# Altium PCB Mechatronic.PcbDoc
Units mil, origin at the board's own origin, x right, y up, seen from the top; angles counter-clockwise.
Board outline 1770 x 4130 mil, 2 copper layers (Top Layer, Bottom Layer), stack 61.756 mil thick; 42 components, 23 nets, 157 pads, 37 vias.
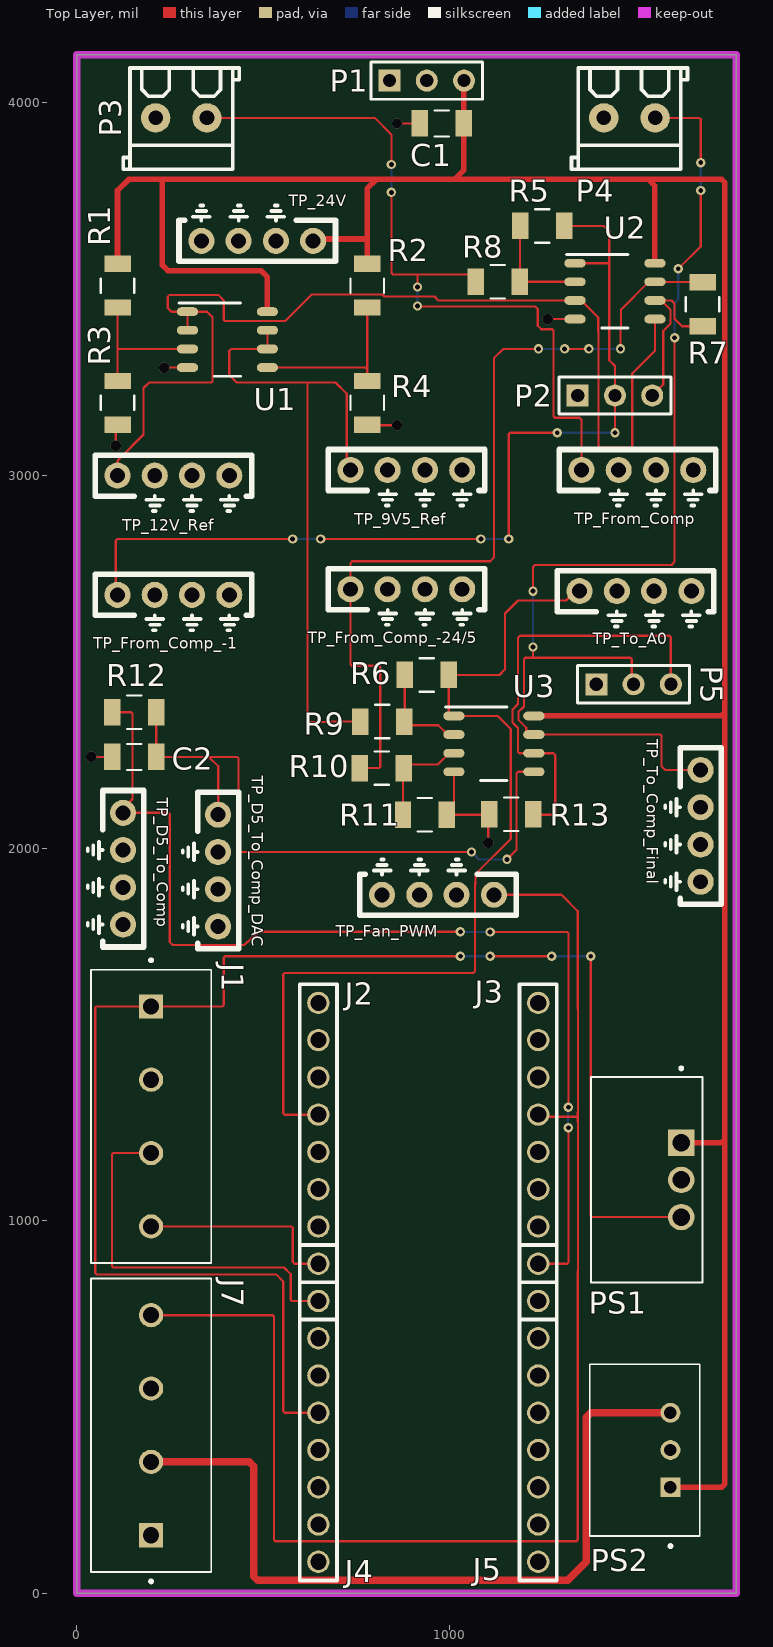
[diagram p0: Top Layer view]
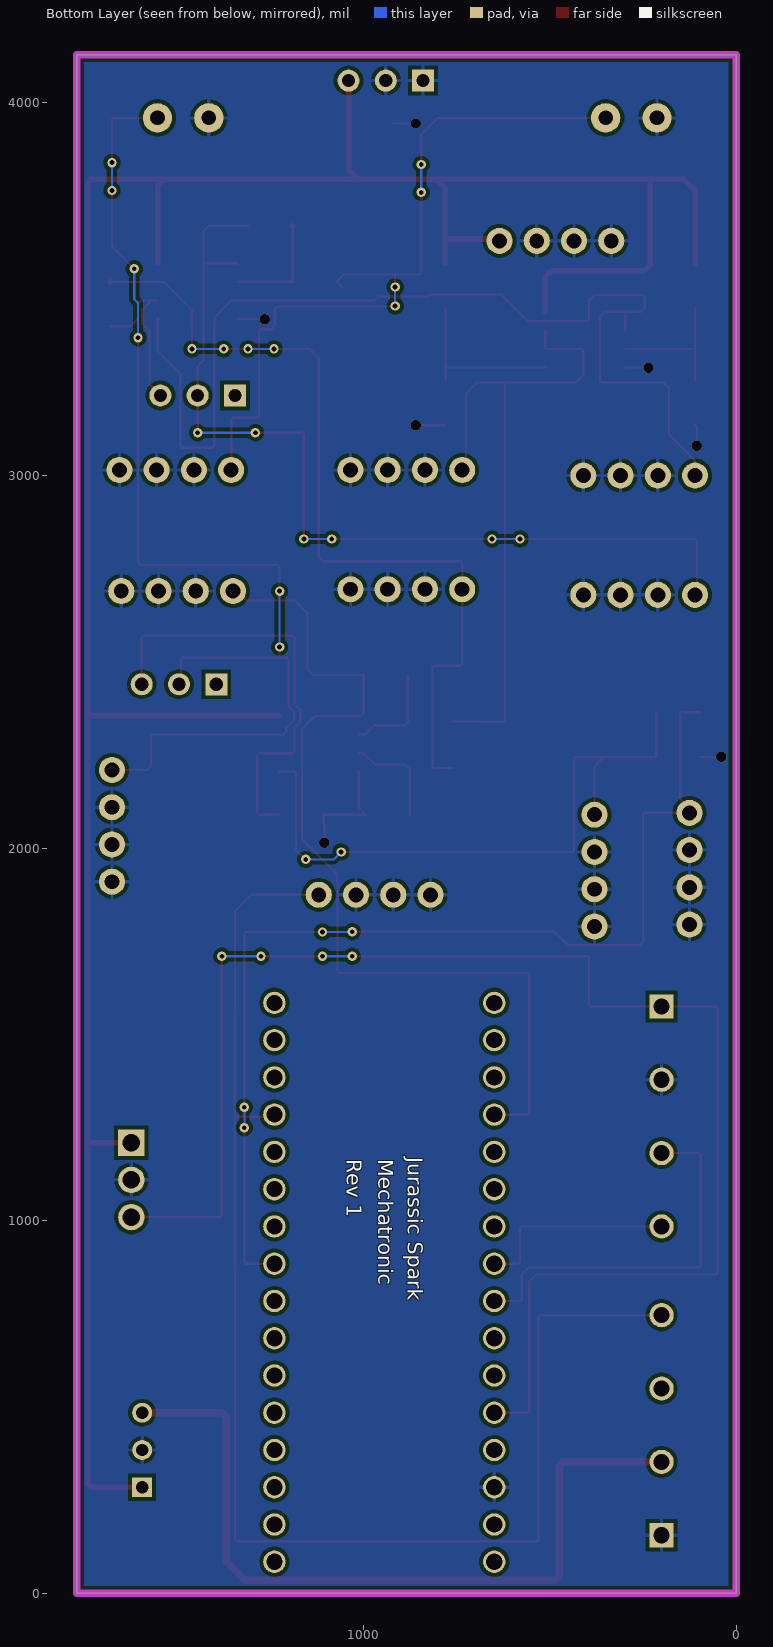
[diagram p1: Bottom Layer view, seen from below]
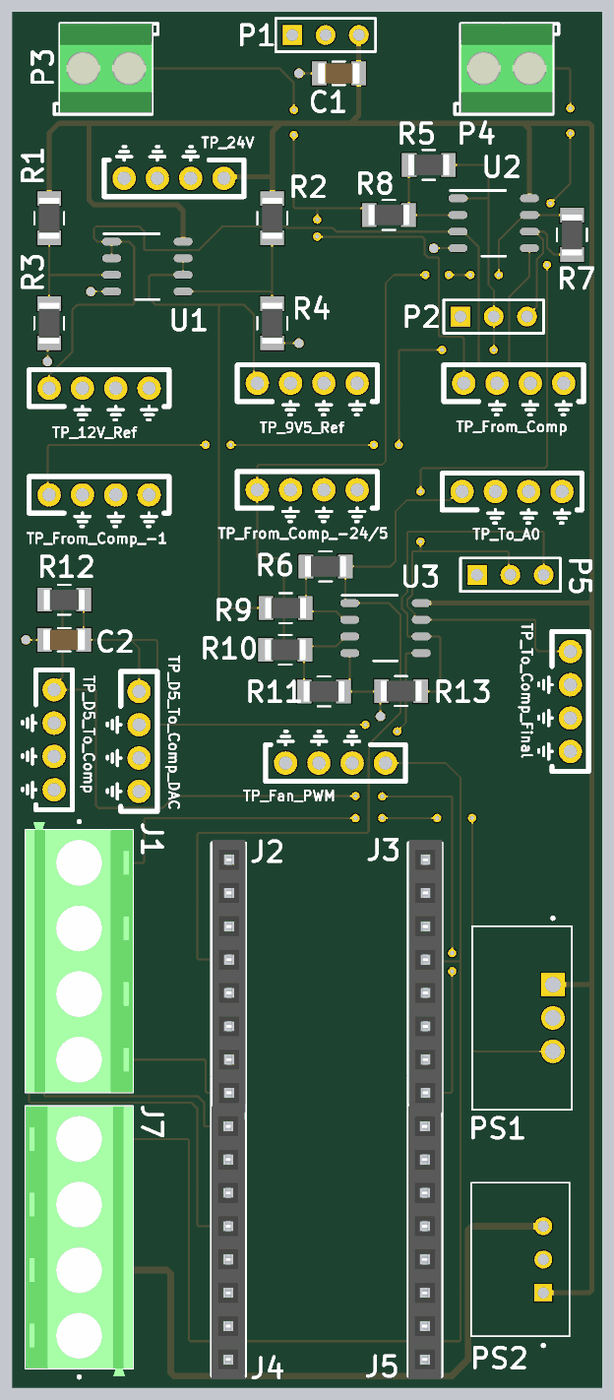
[diagram p2: 3D render of the assembled board from above, using the file's embedded part models]

## Layer stack, top to bottom
Top Solder: solder mask 1, SM-001, Dk 4
Top Layer: signal copper 1.378
Dielectric 1: core 59, Core-043, Dk 4.3
Bottom Layer: signal copper 1.378
Bottom Solder: solder mask 1, SM-001, Dk 4

## Board outline
0,0 1770,0 1770,4130 0,4130

## Design rules (kind name [scope] priority, off if disabled: settings)
BoardOutlineClearance [All] p1: gap=10 ignorepadtopadclearanceinfootprint=FALSE except(0: Arc-SplitContinuation Track-SplitContinuation SMDPad-SplitContinuation THPad-SplitContinuation Via-SplitContinuation Fill-SplitContinuation Poly-SplitContinuation Region-SplitContinuation Text-SplitContinuation)
Clearance [All] p1: gap=10 ignorepadtopadclearanceinfootprint=FALSE
PlaneClearance [All] p1: clearance=10
PlaneConnect [All] p1: planeconnectstyle=Direct reliefexpansion=20 reliefentries=4 reliefconductorwidth=10 reliefairgap=10
PolygonConnect [All] p1: thpad.connectstyle=Relief thpad.reliefconductorwidth=10 thpad.reliefentries=4 thpad.polygonreliefangle="90 Angle" thpad.airgapwidth=10 smdpad.connectstyle=Direct smdpad.reliefconductorwidth=10 smdpad.reliefentries=4 smdpad.polygonreliefangle="90 Angle" smdpad.airgapwidth=10 via.connectstyle=Direct via.reliefconductorwidth=10 via.reliefentries=4 via.polygonreliefangle="90 Angle" via.airgapwidth=10
RoutingVias [All] p1: holewidth=13 width=25 viastyle="Through Hole" minholewidth=13 minwidth=25 maxholewidth=60 maxwidth=80
SolderMaskExpansion [All] p1: expansion=4 istentingtop=FALSE
SupplyNets "Schematic Supply Nets_1" [InNet('GND')] p1: voltage=0.000
SupplyNets "Schematic Supply Nets" [InNet('+24')] p2: voltage=0.000
UnRoutedNet [All] p1: checkbadconnections=TRUE
Width [All] p1: maxlimit=100 minlimit=6 preferedwidth=6 minimp=50.000000 maximp=50.000000 favimp=50.000000
27 further rules are at their usual default settings.

## Components (designator, comment, footprint, x,y, rotation, side; value= is the part's Value field where it differs from the comment)
C1 "22uF" 1206_Passive_Capacitor 980,3945 r0 top
C2 "10uF" 1206_Passive_Capacitor 155,2245 r0 top
J1 "282836-4" TE_282836-4 200,1280.28 r270 top
J2 "PPTC081LFBN-RC" "8_PIN_100MIL - Female" 648.93,885 r90 top value=Female
J3 "PPTC081LFBN-RC" "8_PIN_100MIL - Female" 1238.93,885 r90 top value=Female
J4 "PPTC081LFBN-RC" "8_PIN_100MIL - Female" 648.93,785 r270 top value=Female
J5 "PPTC081LFBN-RC" "8_PIN_100MIL - Female" 1238.93,785 r270 top value=Female
J7 "282836-4" TE_282836-4 200,451.57 r90 top
P1 "Header 3" HDR1X3 840,4060 r0 top
P2 "48k_Pot" HDR1X3 1345,3215 r0 top
P3 "From_Comp_Input" "P_Terminal block 3.5mm-pitch" 281.1,3960 r180 top
P4 "To_Comp" "P_Terminal block 3.5mm-pitch" 1483.9,3960 r180 top
P5 "38k_Pot" HDR1X3 1395,2440 r0 top
PS1 "TSR_3-2450N" CONV_TSR_3-2450N 1530,1110 r270 top
PS2 "TSR_1-2412" CONV_TSR_1-2412 1525,385 r90 top
R1 "10k" 1206_Passive_Resitor 110,3510 r90 top value=10KOhm
R2 "0 Ohm" 1206_Passive_Resitor 780,3510 r90 top value=6kOhm
R3 "10k" 1206_Passive_Resitor 110,3195 r90 top value=10KOhm
R4 "0 Ohm" 1206_Passive_Resitor 780,3195 r90 top value=4kOhm
R5 "10k" 1206_Passive_Resitor 1250,3670 r0 top value=10KOhm
R6 "10k" 1206_Passive_Resitor 940,2465 r0 top value=10KOhm
R7 "10k" 1206_Passive_Resitor 1680,3460 r90 top value=10KOhm
R8 "10k" 1206_Passive_Resitor 1130,3520 r0 top value=10KOhm
R9 "10k" 1206_Passive_Resitor 820,2340 r0 top value=10KOhm
R10 "10k" 1206_Passive_Resitor 819,2215 r0 top value=10KOhm
R11 "10k" 1206_Passive_Resitor 935,2090 r180 top value=10KOhm
R12 "10k" 1206_Passive_Resitor 155,2365 r0 top value=10KOhm
R13 "10k" 1206_Passive_Resitor 1167,2091 r180 top value=10KOhm
TP_9V5_Ref "TP_9V5_Ref" TP10x_Probe 885,3015 r0 top (schematic designator TP3)
TP_12V_Ref "TP_12V_Ref" TP10x_Probe 260,3000 r0 top (schematic designator TP2)
TP_24V "TP_24V" TP10x_Probe 485,3630 r180 top (schematic designator TP1)
TP_D5_To_Comp "TP_D5_To_Comp" TP10x_Probe 125,1945 r270 top (schematic designator TP10)
TP_D5_To_Comp_DAC "TP_D5_To_Comp_DAC" TP10x_Probe 380,1940 r270 top (schematic designator TP8)
TP_Fan_PWM "TP_Fan_PWM" TP10x_Probe 970,1875 r180 top (schematic designator TP11)
TP_From_Comp "TP_From_Comp" TP10x_Probe 1505,3015 r0 top (schematic designator TP4)
TP_From_Comp_-1 "TP_Comp_After_-1" TP10x_Probe 260,2680 r0 top (schematic designator TP5)
TP_From_Comp_-24/5 "TP_Comp_After_-24/5" TP10x_Probe 885,2695 r0 top (schematic designator TP6)
TP_To_A0 "TP_To_A0" TP10x_Probe 1500,2690 r0 top (schematic designator TP7)
TP_To_Comp_Final "TP_To_Comp" TP10x_Probe 1675,2060 r270 top (schematic designator TP9)
U1 "OPA2196IDR" D0008A_N 405,3365 r0 top
U2 "OPA2196IDR" D0008A_N 1445,3495 r0 top
U3 "OPA2196IDR" D0008A_N 1120,2280 r0 top

## Footprints (in the part's own frame and the unit in brackets; to place one, negate y for a bottom-side part, rotate by r counter-clockwise, add the part's x,y. Pads: shape width x height; smd on the part's side, far side on the other; paste and mask are expansions set on the pad)
"8_PIN_100MIL - Female" [mil]
  round 60 hole 43.31: 1(0,0) 2(100,0) 3(200,0) 4(300,0) 5(400,0) 6(500,0) 7(600,0) 8(700,0)
  silkscreen extent -50,-50 750,50, body extent -60,-51 760,49, height 335
1206_Passive_Capacitor [mil]
  rect 44x71 smd: 1(-59,0) 2(59,0)
  silkscreen extent -19,-35 19,35, body extent -63,-31 63,32, height 50
1206_Passive_Resitor [mil]
  rect 44x71 smd: 1(-59,0) 2(59,0)
  silkscreen extent -19,-45 19,45, body extent -61,-31 61,31, height 26
CONV_TSR_1-2412 [mm]
  rect 1.358x1.358 hole 0.85: 1(-2.54,-1.75)
  round 1.358 hole 0.85: 2(0,-1.75) 3(2.54,-1.75)
  silkscreen extent -6.65,-3.75 5.85,3.75
CONV_TSR_3-2450N [mm]
  rect 1.8x1.8 / inner round 1.8 / far side rect 1.8x1.8 hole 1.2: 1(-2.54,2.36)
  round 1.8 hole 1.2: 2(0,2.36) 3(2.54,2.36)
  silkscreen extent -7.7,-3.8 7,3.8
D0008A_N [mm]
  oval 1.45x0.6 smd paste+0 mask+0.051: 1(-2.725,1.905) 2(-2.725,0.635) 3(-2.725,-0.635) 4(-2.725,-1.905) 5(2.725,-1.905) 6(2.725,-0.635) 7(2.725,0.635) 8(2.725,1.905)
  silkscreen extent -3.3,-2.5 0.9,2.5
HDR1X3 [mm] "Connector; Header; 3 Position"
  rect 1.5x1.5 hole 0.9: 1(0,0)
  round 1.5 hole 0.9: 2(2.54,0) 3(5.08,0)
  silkscreen extent -1.27,-1.27 6.35,1.27
"P_Terminal block 3.5mm-pitch" [mm]
  round 2 hole 1: 1(-1.75,0) 2(1.75,0)
  silkscreen extent -3.95,-3.4 3.95,3.5, body extent -3.5,-3.4 3.5,3.4, height 8.4
TE_282836-4 [mm]
  rect 1.65x1.65 / inner round 1.65 / far side rect 1.65x1.65 hole 1.1: 1(-7.5,0)
  round 1.65 hole 1.1: 2(-2.5,0) 3(2.5,0) 4(7.5,0)
  silkscreen extent -10.74,-4.1 10,4.1, body extent -10.6,-4.1 10,4.1, height 10
TP10x_Probe [mil] "Small Probs footprint"
  round 70 hole 40: 1(-150,0) 2(-50,0) 2(50,0) 2(150,0)
  silkscreen extent -210,-95 210,55

## Part data
C1: library part C_22uF_1206, "22uF ±10% 25V X5R 1206 Multilayer Ceramic Capacitors MLCC - SMD/SMT RoHS", LCSC Part#=C12891, MFR Part #=CL31A226KAHNNNE, Datasheet=https://datasheet.lcsc.com/lcsc/1811031514_Samsung-Electro-Mechanics-CL31A226KAHNNNE_C12891.pdf, Type=basic
C2: library part C_10uF_1206, "10uF ±10% 50V X5R 1206 Multilayer Ceramic Capacitors MLCC - SMD/SMT RoHS", LCSC Part#=C13585, MFR Part #=CL31A106KBHNNNE, Datasheet=https://datasheet.lcsc.com/lcsc/1810221112_Samsung-Electro-Mechanics-CL31A106KBHNNNE_C13585.pdf, Type=Basic
J1 J7: "4 Position Wire to Board Terminal Block Horizontal with Board 0.197 (5.00mm) Through Hole", Package=None, Availability="In Stock", Check_prices=https://www.snapeda.com/parts/282836-4/TE+Connectivity+AMP+Connectors/view-part/?ref=eda, MF="TE Connectivity", MP=282836-4, Price=None, Purchase-URL=https://pricing.snapeda.com/search/part/282836-4/?ref=eda, SnapEDA_Link=https://www.snapeda.com/parts/282836-4/TE+Connectivity+AMP+Connectors/view-part/?ref=snap
J2 J3 J4 J5: library part JF_8_PIN_FEMALE, "8 Position Header Connector 0.100\" (2.54mm) Through Hole Tin", LCSC Part#=C27438, Digikey Link=https://www.digikey.com/product-detail/en/PPTC081LFBN-RC/S7006-ND/810147/?itemSeq=304982354, MFR Part #=PPTC081LFBN-RC, Type=Extended
P1: "Header, 3-Pin", LatestRevisionDate=17-Jul-2002, LatestRevisionNote="Re-released for DXP Platform.", Publisher="Altium Limited"
P2 P5: library part "Header 3", "Header, 3-Pin", LatestRevisionDate=17-Jul-2002, LatestRevisionNote="Re-released for DXP Platform.", Publisher="Altium Limited"
P3 P4: library part "P_Terminal block", "Green Straight pin 3.5mm  pitch; P=3.5mm  Screw terminal ROHS", LCSC Part#=C474892, Manufacturer="Cixi Kefa Elec", MFR Part #=KF350-3.5-2P, Datasheet=https://datasheet.lcsc.com/lcsc/2001160007_Cixi-Kefa-Elec-KF350-3-5-2P_C474892.pdf
PS1 PS2: Package=None, Availability=Unavailable, Price=None
  PS1: MF="{'manufacturer': u'Traco Power'}", MP=TSR_3-2450N
  PS2: MP=TSR_1-2412
R1 R3 R5 R6 R7 R8 R9 R10 R11 R12 R13: library part R_10KOhm_1206, "10 kOhms ±5% 0.25W, 1/4W Chip Resistor 1206 (3216 Metric) Automotive AEC-Q200 Thick Film", LCSC Part#=C17902, MFR Part #=RMCF1206FT10K0, Digikey Link=https://www.digikey.com/en/products/detail/stackpole-electronics-inc/RMCF1206FT10K0/1759669, Type=Basic
R2 R4: library part R_0_1206, "CHIP RESISTOR - SURFACE MOUNT 0OHMS ±1% 1/4W 1206 ROHS", LCSC Part#=C17888, MFR Part #=1206W4F0000T5E, Datasheet=https://datasheet.lcsc.com/szlcsc/Uniroyal-Elec-1206W4F0000T5E_C17888.pdf, Mouser link=https://www.mouser.com/ProductDetail/Royalohm/1206W4F0000T5E?qs=e8oIoAS2J1Thbopin%252BsagQ%3D%3D, Type=Basic
TP_9V5_Ref TP_12V_Ref TP_24V TP_D5_To_Comp TP_D5_To_Comp_DAC TP_Fan_PWM TP_From_Comp TP_From_Comp_-1 TP_From_Comp_-24/5 TP_To_A0 TP_To_Comp_Final: library part TP_10x_Probe, "Test Point 300 mil centers"
U1 U2 U3: "Dual, 36-V, low power, all-purpose amplifier with mux-friendly input 8-SOIC -40 to 125", Manufacturer_Name="Texas Instruments", Copyright="Copyright (C) 2026 Ultra Librarian. All rights reserved.", Datasheet=https://www.ti.com/lit/gpn/opa2196, Manufacturer_Part_Number=OPA2196IDR, RefDes=RefDes, Type=TYPE

## Via types
v1: diameter 25, hole 13, Top Layer to Bottom Layer, 30 vias
v2: diameter 28, hole 28, Top Layer to Bottom Layer, 7 vias

## Nets (pads, with @x,y where several pads share a name; then routed paths per layer and width w, separated by ;. In a path a pad name is that pad's centre, name@x,y a point inside that pad or via, vN(x,y) a via of type N, cw(c..) or ccw(c..) an arc to the next point about the centre after c; other vN are vias at no path point)
9V5_Ref: R9.1 TP_9V5_Ref.1 U1.6 U1.7 | length 1815.3
  Top Layer w6: U1.7 U1.6 415,3340 410,3335 410,3270 430,3250 620,3250 ; TP_9V5_Ref.1 725,3025 725,3220 695,3250 620,3250 ; R9.1 683.51,2340 682,2338.49 623.51,2338.49 620,2342 620,3250
12V_Ref: TP_12V_Ref.1 U1.1 U1.2 U2.3 U2.5 | length 2915.6
  Top Layer w6: TP_12V_Ref.1 110.49,3000.49 110.49,3040.49 180,3110 180,3235 195,3250 361.49,3250 365,3253.51 365,3425 350,3440 U1.1 ; U1.2 U1.1 ; U2.5 1552.28,3334.85 1491.49,3274.05 1491.49,3078.51 1487.97,3075 1405,3075 1400.5,3079.5 1400.5,3339.92 ccw(c1375,3340) 1400.5,3340.15 1400,3424.45 1354.45,3470 U2.3 971.06,3470 960.56,3480.5 826.38,3480.5 820.88,3486 631,3486 560,3415 398.51,3415 395,3418.51 395,3470 380,3485 250,3485 245,3480 245,3450 255,3440 U1.1
+24: C1.2 P1.3 PS1.1 PS2.1 R1.2 R2.2 TP_24V.1 U1.8 U2.8 U3.8 | length 7631.1
  Top Layer w15: R1.2 110,3765 140,3795 230,3795 ; U1.8 512.28,3532.72 499.99,3545.01 495,3550 245,3550 230,3565 230,3795 ; TP_24V.1 640,3635 780,3635 ; R2.2 780,3635 ; P1.3 1039.5,4059.5 1039.5,3945.5 C1.2 1039,3819 1015,3795 ; U3.8 1730,2355 1740,2365 ; U2.8 1552.28,3777.72 1535,3795 ; PS2.1 1731.21,285 1740,293.79 1740,1218.79 ; PS1.1 1731.21,1210 1740,1218.79 ; 230,3795 805,3795 ; 780,3635 780,3770 805,3795 ; 805,3795 1015,3795 ; 1015,3795 1535,3795 ; 1535,3795 1731.21,3795 1740,3786.21 1740,2365 ; 1740,1218.79 1740,2365
Fan_PWM: J3.5 J7.4 TP_Fan_PWM.1 | length 3788.4
  Top Layer w6: J7.4 526.49,746.85 530,743.34 530,143.51 533.51,140 1341.49,140 1343.24,141.76 1345,143.52 1345,482.81 1345.5,1249.98 ccw(c1320,1250) 1345.5,1250.44 1345,1279.5 ; TP_Fan_PWM.1 1301.21,1875 1345,1831.21 1345.5,1305.02 cw(c1320,1305) 1345.49,1304.44 1345,1282.02 1345,1279.5 ; J3.5 1244.43,1279.5 1345,1279.5
From_Comp: P3.1 R8.1 TP_From_Comp.1 | length 2089
  Top Layer w6: P3.1 800,3960 845,3915 v1(845,3835) ; v1(845,3760) 845,3543.51 848.51,3540 915,3540 ; v1(915,3455) 916,3454 1231,3454 1238,3447 1238,3402 1247,3393 1276.49,3393 1280,3389.49 1280,3159.01 1283.51,3155.5 1300.56,3155.5 1301.06,3155 1350,3155 1355,3150 TP_From_Comp.1 ; v1(915,3506) 915,3540 ; R8.1@1057,3506 R8.1 1071,3521 1052,3540 915,3540
  Bottom Layer w6: v1(845,3760) v1(845,3835) ; v1(915,3455) v1(915,3506)
GND: C1.1 C2.1 J1.2 J4.6 J7.1 P1.1 P1.2 P3.2 P4.2 PS1.2 PS2.2 R3.1 R4.1 R11.1 R13.2 TP_9V5_Ref.2 TP_12V_Ref.2 TP_24V.2 TP_D5_To_Comp.2 TP_D5_To_Comp_DAC.2 TP_Fan_PWM.2 TP_From_Comp.2 TP_From_Comp_-1.2 TP_From_Comp_-24/5.2 TP_To_A0.2 TP_To_Comp_Final.2 U1.4 U2.4 U3.4 | length 705.1
  Top Layer w6: v2(40,2245) C2.1 ; v2(105,3080) 105,3131 R3.1 ; v2(235,3290) U1.4 ; R4.1 781,3135 v2(860,3135) ; v2(860,3945) C1.1 ; U3.4 1012.72,2108.72 R11.1 1107,2090 R13.2 1105.91,2058.5 1105,2058.5 v2(1105,2015) ; v2(1265,3420) U2.4
Nano_D5_To_Comp: J3.1 R12.1 TP_D5_To_Comp.1 | length 2857.5
  Top Layer w6: R12.1 146.49,2365 150,2361.49 150,2132.23 125,2107.23 TP_D5_To_Comp.1 246.49,2095 250,2091.49 250,1748.01 258.01,1740 383.47,1740 449.87,1740 486.9,1773.45 488.01,1774.45 489.61,1776 v1(1030,1776) ; v1(1110,1775) 1316.49,1775 1320,1771.49 v1(1320,1305) ; J3.1 1316.49,885 1320,888.51 v1(1320,1250)
  Bottom Layer w6: v1(1030,1776) 1030.5,1775.5 1109.5,1775.5 v1(1110,1775) ; v1(1320,1250) 1319.18,1250.82 1319.18,1304.18 v1(1320,1305)
NetC2_2: C2.2 R12.2 TP_D5_To_Comp_DAC.1 U3.5 | length 1775.5
  Top Layer w6: R12.2 C2.2 355,2245 ; TP_D5_To_Comp_DAC.1 380,2220 355,2245 ; v1(1060,1990) 438.51,1990 435,1993.51 435,2241.49 431.49,2245 355,2245 ; v1(1155,1970) 1181,1996 1181,2201.49 1184.51,2205 U3.5
  Bottom Layer w6: v1(1060,1990) 1080,1970 v1(1155,1970)
NetJ1_1: J1.1 J4.4 PS1.3 | length 4073.4
  Top Layer w6: J4.4 558.51,485 555,488.51 555,837.37 536.07,856.31 53.51,856.31 50,859.82 50,1572.04 53.51,1575.55 J1.1 391.49,1575.55 395,1579.07 395,1706.49 398.51,1710 v1(1030,1710) ; v1(1110,1710) v1(1275,1710) ; v1(1380,1710) 1380,1013.51 1383.51,1010 PS1.3
  Bottom Layer w6: v1(1030,1710) v1(1110,1710) ; v1(1275,1710) v1(1380,1710)
NetJ1_3: J1.3 J4.1 | length 1038.8
  Top Layer w6: J1.3 98.51,1181.85 95,1178.34 95,878.51 98.51,875 556.49,875 575,856.49 575,788.51 578.51,785 J4.1
NetJ1_4: J1.4 J2.1 | length 543.9
  Top Layer w6: J1.4 576.49,985 580,981.49 580,890 585,885 J2.1
NetJ7_2: J7.2 PS2.3 | length 2112.3
  Top Layer w20: J7.2 463.28,353.15 475,341.43 475,46.72 486.72,35 1318.28,35 1368,84.72 1368,473.28 1379.72,485 PS2.3
NetP2_2: P2.2 R5.2 TP_From_Comp_-1.1 U2.1 | length 2536.1
  Top Layer w6: TP_From_Comp_-1.1 105,2685 105,2825 110,2830 v1(580,2830) ; v1(655,2830) v1(1085,2830) ; v1(1160,2830) 1160,3111.49 1163.51,3115 v1@1289.59,3115 ; R5.2 1415,3670 1429.5,3655.5 1429.5,3570 ; U2.1 1429.5,3570 ; v1(1445,3115) 1445,3293.94 1429.5,3309.44 1429.5,3570
  Bottom Layer w6: v1(580,2830) v1(655,2830) ; v1(1085,2830) v1(1160,2830) ; v1@1290.41,3115 v1@1444.59,3115
  other v1: 1290,3115
NetP2_3: P2.3 R7.1 U2.6 | length 482.2
  Top Layer w6: P2.3 1574.49,3244.49 1574.49,3388 1593.83,3407.34 1593.83,3445.19 1569.02,3470 U2.6 1596.49,3470 1605,3461.49 1605,3421.06 1615.56,3410.5 1625.06,3401 R7.1
NetP5_3: P5.3 R13.1 U3.6 | length 1180
  Top Layer w6: R13.1 1227,2090 1281.49,2090 1285,2093.51 1285,2250 1280,2255 U3.6 1188.51,2255 1185,2258.51 1185,2322.84 1183.6,2324.23 1174.23,2333.6 1169.74,2338.1 1169.74,2371.9 1185,2387.16 1185,2565 1190,2570 1591.49,2570 1595,2566.49 P5.3
NetR1_1: R1.1 R3.2 U1.3 | length 384.7
  Top Layer w6: R3.2 110,3340 ; R1.1 110,3340 ; U1.3 110,3340
NetR2_1: R2.1 R4.2 U1.5 | length 497.8
  Top Layer w6: U1.5 775,3290 780,3285 R4.2 R2.1
NetR5_1: R5.1 R8.2 U2.2 | length 298.1
  Top Layer w6: R8.2 U2.2 ; R8.2@1190,3521 R5.1@1190,3669
  Top Layer w15: R5.1@1190,3669 R5.1
NetR6_1: R6.1 R9.2 U3.2 | length 274
  Top Layer w6: R6.1 881,2342 R9.2 889,2330 970.98,2330 995.98,2305 U3.2
NetR7_2: R7.2 R10.1 TP_From_Comp_-24/5.1 U2.7 | length 2310.8
  Top Layer w6: R10.1 811.49,2215 815,2218.51 815,2486.49 811.49,2490 738.51,2490 735,2493.51 TP_From_Comp_-24/5.1 735,2765 740,2770 1110,2770 1120,2780 1120,3315 1145,3340 v1(1240,3340) ; v1(1310,3340) v1(1375,3340) ; v1(1460,3340) 1460,3396.61 1461,3397.61 1461,3445.45 1535.55,3520 U2.7 ; U2.7@1552.78,3519.5 R7.2@1679.5,3519.5
  Top Layer w15: R7.2@1679.5,3519.5 R7.2
  Bottom Layer w6: v1(1240,3340) v1(1310,3340) ; v1(1375,3340) v1(1460,3340)
NetR10_2: R10.2 R11.2 U3.3 | length 277.1
  Top Layer w6: R11.2 876,2213 888,2225 970,2225 1000,2255 U3.3
To_Arduino_A0: J2.5 R6.2 TP_To_A0.1 U3.1 | length 2493
  Top Layer w6: J2.5 558.51,1285 555,1288.51 555,1661.49 558.51,1665 1064.04,1665 1069.68,1670.64 1069.68,1891.36 1069.68,1891.47 1069.68,1891.65 1071.09,1928.83 1071.18,1931.18 1072.85,1932.85 1165,2025 1165,2320.21 1130.21,2355 1007.14,2355 999,2363.14 R6.2 1135,2465 1150,2480 1150,2630 1184.5,2664.5 1313.27,2664.5 1338.77,2690 TP_To_A0.1
To_Comp: P4.1 P5.2 TP_To_Comp_Final.1 U3.7 | length 3099.5
  Top Layer w6: v1(1225,2540) 1225,2511 ; v1(1225,2690) 1225,2755 1230,2760 1596.49,2760 1605,2768.51 v1(1605,3370) ; P5.2 1490,2445 1490,2507.49 1486.49,2511 1225,2511 ; P4.1 1671.49,3960 1675,3956.49 v1(1675,3840) ; v1(1615,3555) 1675,3615 v1(1675,3765) ; TP_To_Comp_Final.1 1580,2210 1570,2220 1570,2301.49 1566.49,2305 U3.7 1215.32,2305 1207.18,2313.14 1207.18,2323.28 1185.74,2344.72 1185.74,2365.28 1201,2380.54 1201,2507.49 1204.51,2511 1225,2511
  Bottom Layer w6: v1(1225,2540) v1(1225,2690) ; v1(1605,3370) 1605,3463.18 1615,3473.18 v1(1615,3555) ; v1(1675,3765) v1(1675,3840)
pads on no net: J2.2 J2.3 J2.4 J2.6 J2.7 J2.8 J3.2 J3.3 J3.4 J3.6 J3.7 J3.8 J4.2 J4.3 J4.5 J4.7 J4.8 J5.1 J5.2 J5.3 J5.4 J5.5 J5.6 J5.7 J5.8 J7.3 P2.1 P5.1

## Polygon pours and split planes (outlines as drawn)
GND on Bottom Layer "GND_L02_P001" (solid, pour order 1): 10,4120 1760,4120 1760,10 10,10

## Keep-outs
Keep-Out Layer:
  the board outline again, w20

## Silkscreen, mask and mechanical layers (free items; w line width, h text height)
Bottom Overlay:
  text "Jurassic Spark" at 881.67,1170 h40 r90
  text "Mechatronic" at 960,1165 h40 r90
  text "Rev 1" at 1045,1165 h40 r90